# EAGLE board Board (EAGLE 7.1.0)
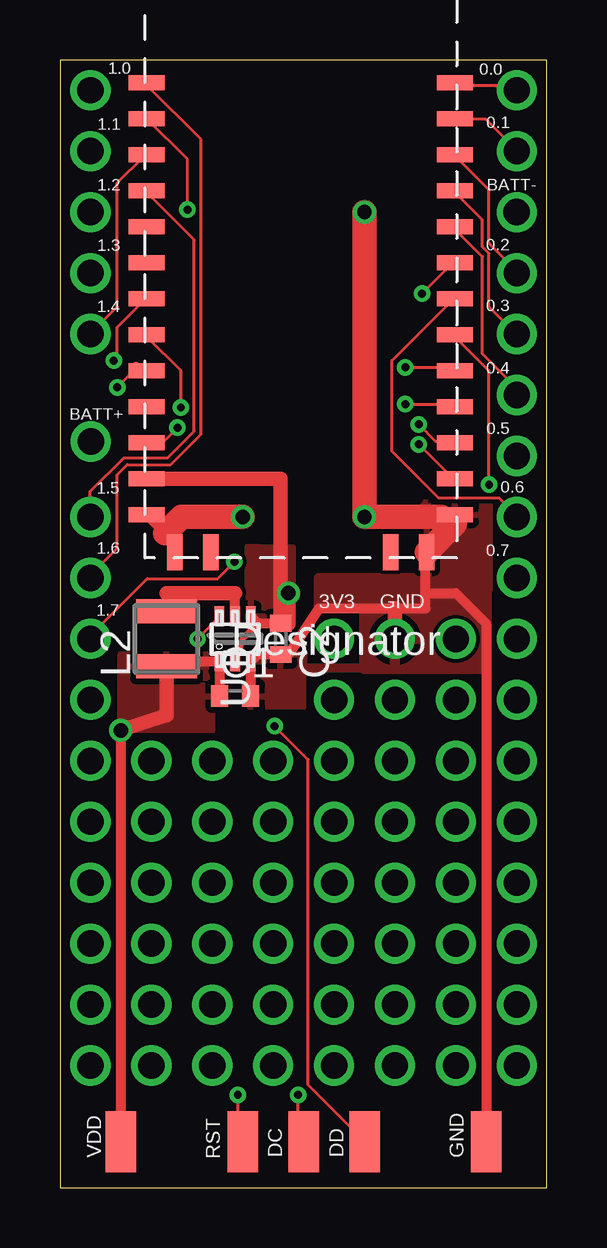
[diagram p0: board, top side]
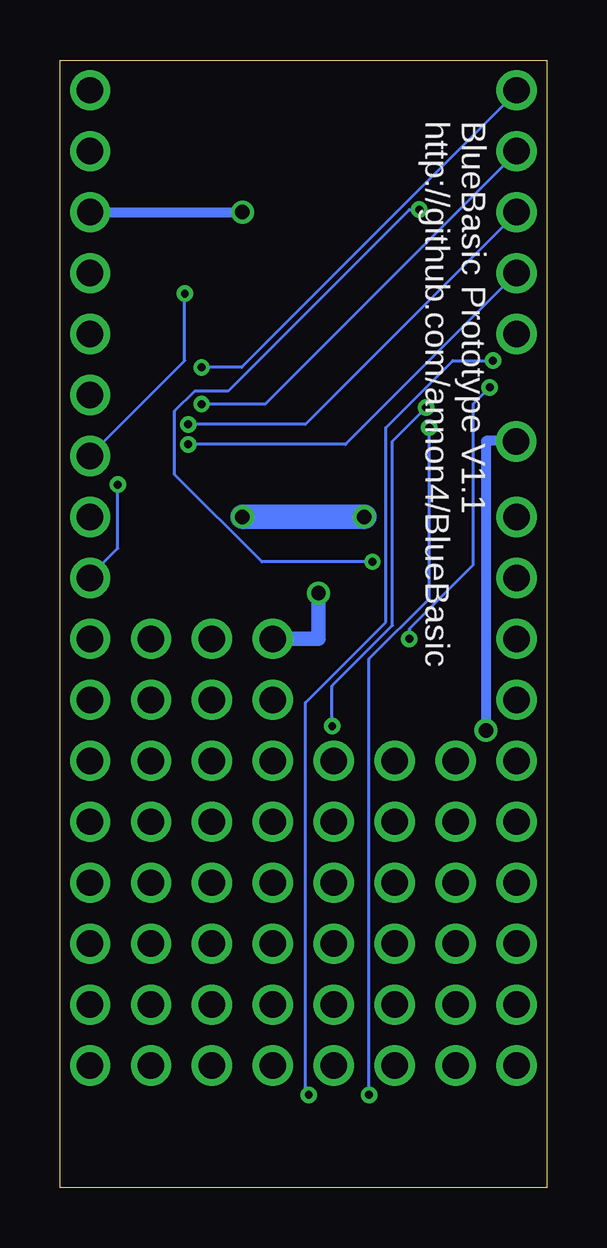
[diagram p1: board, bottom side, seen from below]

Size 20.31 x 46.98 mm. Coordinates in mm from the lower left corner, seen from the top.
Outline: 0,0 20.31,0 20.31,46.98 0,46.98 0,0
Copper layers (1*16): Top 0.0356mm / dielectric 1.5011mm / Bottom 0.0356mm
Design rules "LaenPCBOrder *": minimum track width 5mil, minimum drill 13mil, track to track 6mil, track to pad 6mil, pad to pad 6mil, via to via 6mil, smd to smd 6mil, copper to edge 15mil, drill to drill 6mil, minimum pad ring 7mil, minimum via ring 7mil, stop-mask expansion 3mil, vias tented up to drill 3mil, thermal gap 10mil

## Footprints (pad centres in the part's own frame; a part is rotated, then mirrored left to right if it is on the bottom)
1,6/0,9 = drill 1.1 pad 1.676: 1 0,0
C0402 = smd 0.7 x 0.9: 1 -0.65,0; 2 0.65,0
SMD1,27-2,54 = smd 1.27 x 2.54: 1 0,0
26.9X13X2.2_BOARD = smd 1.5 x 0.635: 1 -7.183,0; 2 -7.183,-1.5; 3 -7.183,-3; 4 -7.183,-4.5; 5 -7.183,-6; 6 -7.183,-7.5; 8 -7.183,-10.5; 9 -7.183,-12; 10 -7.183,-13.5; 11 -7.183,-15; 12 -7.183,-16.5; 13 -7.183,-18; 22 5.683,-18; 23 5.683,-16.5; 24 5.683,-15; 25 5.683,-13.5; 26 5.683,-12; 27 5.683,-10.5; 28 5.683,-9; 29 5.683,-7.5; 30 5.683,-6; 31 5.683,-4.5; 32 5.683,-3; 33 5.683,-1.5; 34 5.683,0; $7 -7.183,-9 | smd 0.635 x 1.5: 14 -6,-19.558; 15 -4.5,-19.558; 20 3,-19.558; 21 4.5,-19.558
SM-NE29 = smd 1 x 2.54: 1 -1.15,0; 2 1.15,0
DCK0006A = smd 0.838 x 0.406: 1 -0.94,0.66; 2 -0.94,0; 3 -0.94,-0.66; 4 0.94,-0.66; 5 0.94,0; 6 0.94,0.66

## Placement (x,y rotation side)
BATT+  [1,6/0,9]  1.28,31.09 0 bottom
BATT-  [1,6/0,9]  19.05,40.64 0 bottom
C1  [C0402]  7.3,20.48 0 top
C2  [C0402]  9.21,22.86 270 top
DC  [SMD1,27-2,54]  10.16,1.9 0 top
DD  [SMD1,27-2,54]  12.7,1.9 0 top
E1  HM-10-BOARD  [26.9X13X2.2_BOARD]  10.79,46.04 0 top
GND  [SMD1,27-2,54]  17.78,1.9 0 top
L2  [SM-NE29]  4.45,22.86 90 top
P0_0  [1,6/0,9]  19.05,45.72 0 top
P0_1  [1,6/0,9]  19.05,43.18 0 top
P0_2  [1,6/0,9]  19.05,38.1 0 top
P0_3  [1,6/0,9]  19.05,35.56 0 top
P0_4  [1,6/0,9]  19.05,33.02 0 top
P0_5  [1,6/0,9]  19.05,30.48 0 top
P0_6  [1,6/0,9]  19.05,27.94 0 top
P0_7  [1,6/0,9]  19.05,25.4 0 top
P1_0  [1,6/0,9]  1.27,45.72 0 top
P1_1  [1,6/0,9]  1.27,43.18 0 top
P1_2  [1,6/0,9]  1.27,40.64 0 top
P1_3  [1,6/0,9]  1.27,38.1 0 top
P1_4  [1,6/0,9]  1.27,35.56 0 top
P1_5  [1,6/0,9]  1.27,27.94 0 top
P1_6  [1,6/0,9]  1.27,25.4 0 top
P1_7  [1,6/0,9]  1.27,22.86 0 top
P2_0  [1,6/0,9]  16.51,10.16 0 top
P2_1  [1,6/0,9]  11.43,20.32 0 top
P2_2  [1,6/0,9]  1.27,17.78 0 top
PAD1  [1,6/0,9]  6.35,10.16 0 top
PAD2  [1,6/0,9]  8.89,10.16 0 top
PAD3  [1,6/0,9]  11.43,10.16 0 top
PAD4  [1,6/0,9]  13.97,10.16 0 top
PAD5  [1,6/0,9]  1.27,12.7 0 top
PAD6  [1,6/0,9]  13.97,7.62 0 top
PAD7  [1,6/0,9]  3.81,10.16 0 top
PAD8  [1,6/0,9]  1.27,5.08 0 top
PAD9  [1,6/0,9]  3.81,5.08 0 top
PAD10  [1,6/0,9]  19.05,10.16 0 top
PAD11  [1,6/0,9]  6.35,5.08 0 top
PAD12  [1,6/0,9]  11.43,7.62 0 top
PAD13  [1,6/0,9]  13.97,22.86 0 top
PAD14  [1,6/0,9]  1.27,20.32 0 top
PAD15  [1,6/0,9]  8.89,5.08 0 top
PAD16  [1,6/0,9]  11.43,5.08 0 top
PAD17  [1,6/0,9]  11.43,22.86 0 top
PAD18  [1,6/0,9]  1.27,15.24 0 top
PAD19  [1,6/0,9]  1.27,10.16 0 top
PAD20  [1,6/0,9]  1.27,7.62 0 top
PAD21  [1,6/0,9]  13.97,5.08 0 top
PAD22  [1,6/0,9]  16.51,5.08 0 top
PAD23  [1,6/0,9]  19.05,5.08 0 top
PAD24  [1,6/0,9]  3.81,17.78 0 top
PAD25  [1,6/0,9]  6.35,17.78 0 top
PAD26  [1,6/0,9]  8.89,17.78 0 top
PAD27  [1,6/0,9]  16.51,7.62 0 top
PAD28  [1,6/0,9]  3.81,15.24 0 top
PAD29  [1,6/0,9]  8.89,15.24 0 top
PAD30  [1,6/0,9]  19.05,7.62 0 top
PAD31  [1,6/0,9]  3.81,12.7 0 top
PAD32  [1,6/0,9]  6.35,15.24 0 top
PAD40  [1,6/0,9]  6.35,12.7 0 top
PAD41  [1,6/0,9]  8.89,12.7 0 top
PAD48  [1,6/0,9]  19.05,15.24 90 top
PAD49  [1,6/0,9]  19.05,12.7 90 top
PAD50  [1,6/0,9]  16.51,20.32 90 top
PAD51  [1,6/0,9]  13.97,20.32 90 top
PAD52  [1,6/0,9]  16.51,17.78 90 top
PAD53  [1,6/0,9]  16.51,15.24 90 top
PAD54  [1,6/0,9]  16.51,12.7 90 top
PAD55  [1,6/0,9]  3.81,7.62 90 top
PAD56  [1,6/0,9]  19.05,22.86 0 top
PAD57  [1,6/0,9]  19.05,20.32 0 top
PAD58  [1,6/0,9]  19.05,17.78 0 top
PAD59  [1,6/0,9]  8.89,7.62 90 top
PAD60  [1,6/0,9]  13.97,17.78 90 top
PAD61  [1,6/0,9]  13.97,15.24 90 top
PAD62  [1,6/0,9]  13.97,12.7 90 top
PAD63  [1,6/0,9]  16.51,22.86 90 top
PAD64  [1,6/0,9]  6.35,7.62 90 top
PAD65  [1,6/0,9]  11.43,17.78 90 top
PAD66  [1,6/0,9]  11.43,15.24 90 top
PAD67  [1,6/0,9]  11.43,12.7 90 top
RST  [SMD1,27-2,54]  7.62,1.9 0 top
U1  Value  [DCK0006A]  7.3,22.86 90 top
VDD  [SMD1,27-2,54]  2.54,1.9 0 top

## Library data of the parts
BATT+ BATT- DC DD GND P0_0 P0_1-P0_7 P1_0 P1_1-P1_7 P2_0 P2_1 P2_2 PAD1-PAD32 PAD40 PAD41 PAD48-PAD67 RST VDD = pads
C1 C2 = resistor
E1 = HM-10
L2 = NR3015T4R7M; OC_FARNELL: unknown; OC_NEWARK: unknown
U1 = tps61221; COMPTYPE: IC; MANUFACTURER: Texas Instruments; MOUNTTYPE: SMT; PACKAGEREFERENCE: DCK0006A; PARTNUMBER: TPS61221DCK; PIN_COUNT: 6; REFDES: RefDes; ROHS: Y; TYPE: TYPE

## Nets
3V3: C2.1 E1.12 PAD17.1 U1.2 U1.4
DC: DC.1 E1.$7
DD: DD.1 E1.8
GND: BATT-.1 C1.2 C2.2 E1.13 E1.14 E1.21 E1.22 GND.1 PAD13.1 U1.3
N$1: E1.28 P0_6.1
N$2: E1.27 P0_7.1
N$6: E1.23 P1_3.1
N$7: E1.24 P1_2.1
N$8: E1.25 P1_1.1
N$9: E1.31 P0_3.1
N$10: E1.30 P0_4.1
N$11: E1.29 P0_5.1
N$12: E1.26 P1_0.1
N$13: E1.2 P1_7.1
N$14: E1.1 P1_6.1
N$15: E1.4 P1_5.1
N$16: E1.3 P1_4.1
N$17: E1.9 U1.6
N$18: E1.32 P0_2.1
N$22: L2.2 U1.5
P0_0: E1.34 P0_0.1
P0_1: E1.33 P0_1.1
RST: E1.11 RST.1
VDD: BATT+.1 C1.1 L2.1 U1.1 VDD.1

## Tracks (layer width: path | path; a pad name or v marks a point on that pad's centre or on a via)
3V3  (via drill 0.6)
  Top 0.254: 8.25,23.51 7.62,22.86 U1.2
  Top 0.406: U1.4 8.25,23.51 C2.1
  Top 0.61: E1.12 9.21,29.54 C2.1 9.53,23.49 v9.53,24.76
  Bottom 0.61: v9.53,24.76 9.53,22.86 PAD17.1
  pour Top: 8.26,26.67 9.7,26.67 9.7,23.56 7.88,23.56 7.88,23.6 7.83,23.6 7.83,26.71 8.26,26.71
DC  (via drill 0.33)
  Top 0.127: v2.25,34.45 2.39,34.59 2.39,35.85 3.5,36.97 E1.$7 | v9.93,3.86 9.93,2.04 10.07,1.9 DC.1
  Bottom 0.127: v2.25,34.45 3.92,34.45 6.72,31.66 6.72,23.56 10.07,20.21 10.07,4 v9.93,3.86
DD  (via drill 0.33)
  Top 0.127: v5.04,32.5 5.04,34.04 3.65,35.43 E1.8 | v8.95,19.23 10.35,17.83 10.35,4.28 12.72,1.9 DD.1
  Bottom 0.127: v5.04,32.5 6.44,31.1 6.44,23.42 8.95,20.9 v8.95,19.23
GND  (via drill 0.6)
  Top 0.127: E1.21 15.24,26.21 15.24,26.03
  Top 0.254: 15.88,27.94 E1.22
  Top 0.406: C1.2 U1.3 8.25,22.21 C2.2 9.22,22.22 9.53,22.22 10.79,24.13 13.97,24.13 15.24,24.13 15.24,24.76 | 16.48,27.66 E1.22 | E1.13 4.39,27.25 4.79,26.85 E1.14 | 15.24,24.76 15.24,26.03 | GND.1 17.78,23.49 16.51,24.76 15.24,24.76
  Top 0.61: PAD13.1 13.97,24.13
  Top 1.016: E1.21 16.48,27.66 | 4.39,27.25 5.08,27.94 v7.62,27.94 | 15.88,27.94 v12.7,27.94 v12.7,40.64
  Bottom 0.406: v12.7,40.64 18.41,40.64 BATT-.1
  Bottom 1.016: v12.7,27.94 v7.62,27.94
  pour Top: 10.79,24.13 10.79,25.4 17.78,25.4 17.78,21.59 12.7,21.59 12.7,24.13
  pour Top: 14.07,21.57 10.14,21.57 10.14,20.03 7.91,20.03 7.91,20.16 7.91,22.24 10.19,22.24 10.19,22.2 10.17,22.2 10.17,21.72 14.25,21.72 14.25,21.7 14.21,21.7 14.21,21.6
  pour Top: 15.13,28.41 15.13,24.94 17.87,24.94 17.87,24.91 17.93,24.91 17.93,28.39 15.24,28.39 15.24,28.57
N$1
  Top 0.127: E1.28 16.36,36.97 13.84,34.45 13.84,30.68 15.8,28.73 18.31,28.73 19.01,28.03 P0_6.1
N$2  (via drill 0.33)
  Top 0.127: v17.89,29.29 17.89,34.04 16.5,35.43 E1.27
  Bottom 0.127: v17.89,29.29 17.89,26.63 19.01,25.51 P0_7.1
N$6  (via drill 0.33)
  Top 0.127: v14.96,30.96 16.36,29.57 E1.23
  Bottom 0.127: v14.96,30.96 8.39,30.96 1.27,38.09 P1_3.1
N$7  (via drill 0.33)
  Top 0.127: v14.96,31.8 15.66,31.1 16.36,31.1 E1.24
  Bottom 0.127: v14.96,31.8 10.07,31.8 1.27,40.6 P1_2.1
N$8  (via drill 0.33)
  Top 0.127: v14.4,32.64 16.36,32.64 E1.25
  Bottom 0.127: v14.4,32.64 11.75,32.64 1.27,43.12 P1_1.1
N$9
  Top 0.127: E1.31 16.5,41.44 17.61,40.32 17.61,39.2 17.89,38.92 17.89,36.69 19.01,35.57 P0_3.1
N$10
  Top 0.127: E1.30 16.5,39.9 17.61,38.79 17.61,34.73 19.01,33.34 19.01,33.06 P0_4.1
N$11  (via drill 0.33)
  Top 0.127: v15.1,37.25 16.36,38.51 E1.29
  Bottom 0.127: v15.1,37.25 15.1,34.45 19.01,30.54 P0_5.1
N$12  (via drill 0.33)
  Top 0.127: v14.4,34.18 16.36,34.18 E1.26
  Bottom 0.127: v14.4,34.18 12.72,34.18 1.27,45.63 P1_0.1
N$13  (via drill 0.33)
  Top 0.127: v5.32,40.74 5.32,42.84 3.65,44.51 E1.2 | v7.28,26.07 6.58,25.38 3.65,25.38 1.27,23 P1_7.1
  Bottom 0.127: v5.32,40.74 5.74,40.74 13.28,33.2 14.68,33.2 15.52,32.36 15.52,29.7 11.89,26.07 v7.28,26.07
N$14
  Top 0.127: E1.1 3.65,45.91 5.88,43.67 5.88,31.38 4.62,30.12 2.81,30.12 2.39,29.7 2.39,26.63 1.27,25.51 P1_6.1
N$15
  Top 0.127: P1_5.1 1.27,29.01 2.67,30.4 4.48,30.4 5.6,31.52 5.6,39.48 3.65,41.44 E1.4
N$16
  Top 0.127: E1.3 3.5,42.98 2.39,41.86 2.39,36.69 1.27,35.57 P1_4.1
N$17  (via drill 0.33)
  Top 0.127: v5.74,22.86 6.58,23.7 U1.6 | v2.39,33.34 3.23,34.18 E1.9
  Top 0.254: 3.17,34.29 E1.9
  Bottom 0.127: v5.74,22.86 5.74,23.28 3.09,25.93 3.09,32.64 v2.39,33.34
N$18
  Top 0.127: E1.32 16.5,42.98 17.89,41.58 17.89,39.34 19.01,38.23 P0_2.1
N$22
  Top 0.254: 4.45,24.76 L2.2
  Top 0.406: U1.5 7.3,24.76
  Top 0.61: 7.3,24.76 4.45,24.76
P0_0
  Top 0.127: E1.34 16.5,45.91 18.87,45.91 19.01,45.77 P0_0.1
P0_1
  Top 0.127: E1.33 16.5,44.51 17.75,44.51 19.01,43.26 P0_1.1
RST  (via drill 0.33)
  Top 0.127: v4.9,31.66 4.34,31.1 3.65,31.1 E1.11 | v7.42,3.86 7.42,2.04 7.56,1.9 RST.1
  Bottom 0.127: v4.9,31.66 4.9,24.54 7.42,22.02 v7.42,3.86
VDD  (via drill 0.6)
  Top 0.406: C1.1 6.65,21.91 U1.1 4.65,21.92 L2.1 4.45,21.59 | v2.54,19.05 VDD.1
  Top 0.61: L2.1 4.45,19.68 v2.54,19.05
  Bottom 0.406: v2.54,19.05 2.54,31.12 1.91,31.12 BATT+.1
  pour Top: 3.17,22.22 6.35,22.22 6.35,19.05 2.54,19.05 2.54,22.22

## Text on the board
tPlace: 1.0 | 0.0 | 1.1 | 0.1 | 1.2 | BATT- | 1.3 | 0.2 | 0.3 | 1.4 | 0.4 | BATT+ | 0.5 | 1.5 | 0.6 | 1.6 | 0.7 | 1.7 | 3V3 | GND | VDD | RST | DC | DD | GND
bPlace: BlueBasic Prototype V1.1 / http://github.com/annon4/BlueBasic